# Altium PCB USB_Charger.PcbDoc
Units mm, origin at the board's own origin, x right, y up, seen from the top; angles counter-clockwise.
Board outline 29.21 x 14 mm, 2 copper layers (Top Layer, Bottom Layer); 18 components, 13 nets, 55 pads, 0 vias.
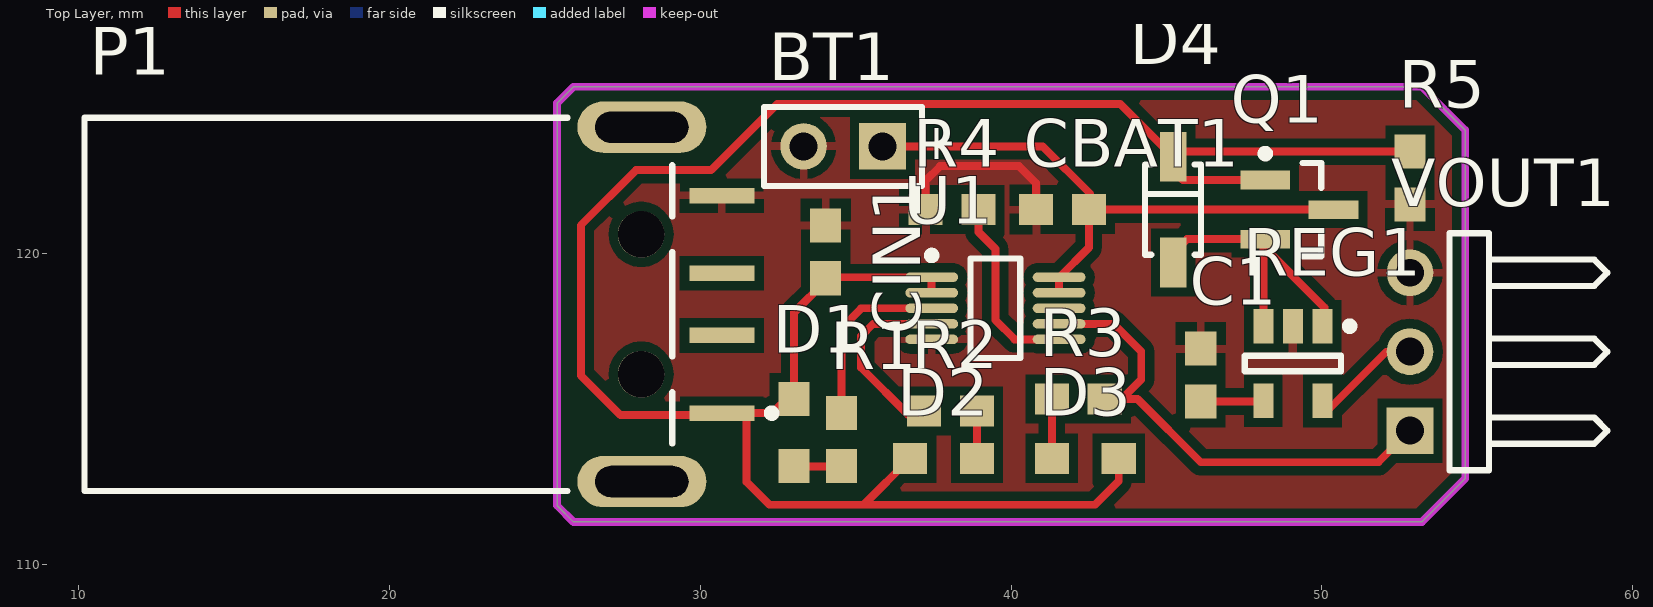
[diagram p0: Top Layer view]
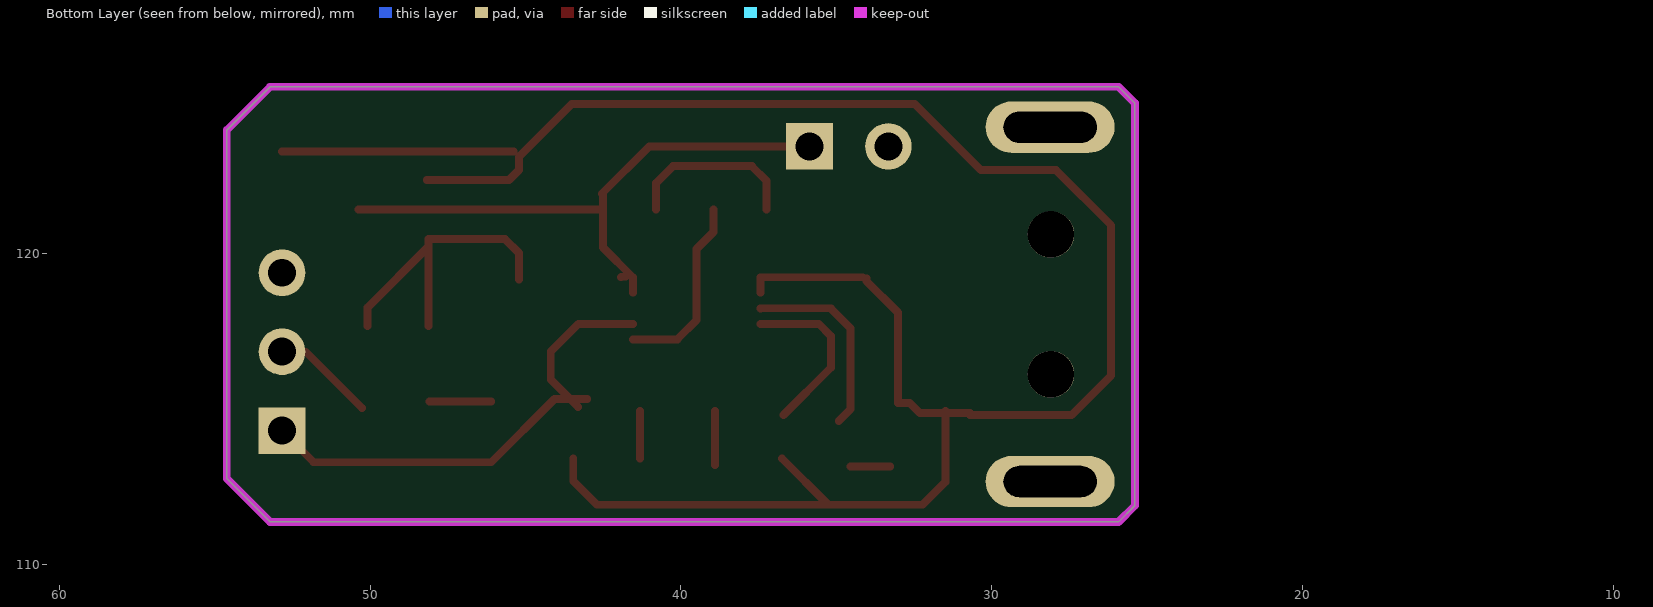
[diagram p1: Bottom Layer view, seen from below]

## Layer stack, top to bottom
Top Layer: signal copper 0.0356
Dielectric: dielectric 0.32, FR-4, Dk 4.8
Bottom Layer: signal copper 0.0356

## Board outline
25.923,111.364 25.4,111.887 25.4,124.841 25.923,125.364 53.213,125.364 54.61,123.967 54.61,112.761 53.213,111.364

## Design rules (kind name [scope] priority, off if disabled: settings)
Clearance [All] p1: gap=0.3
PolygonConnect [All] p1: connectstyle=Relief reliefconductorwidth=0.254 reliefentries=4 polygonreliefangle="90 Angle"
RoutingVias [All] p1: holewidth=0.711 width=1.27 viastyle="Through Hole" minholewidth=0.711 minwidth=1.27 maxholewidth=0.711 maxwidth=1.27
SilkscreenOverComponentPads [All] p1: minsilkscreentomaskgap=0.254
SolderMaskExpansion [All] p1: expansion=0.102
Width [All] p1: maxlimit=0.254 minlimit=0.254 preferedwidth=0.254
27 further rules are at their usual default settings.

## Components (designator, comment, footprint, x,y, rotation, side; value= is the part's Value field where it differs from the comment)
BT1 "Li-Ion" BAT-2 34.597,123.444 r180 top
C1 "Cap" 1608[0603] 46.101,116.089 r270 top
CBAT1 "Cap" 1608[0603] 41.656,121.412 r180 top
CIN1 "Cap" 1608[0603] 34.036,120.054 r270 top
D1 "Charge in Progress" 2013[0805] 33.02,115.316 r270 top
D2 "Charge Complete" 2013[0805] 36.754,113.411 r0 top
D3 "Power OK" 2013[0805] 43.464,113.411 r180 top
D4 "D Schottky" SOD123/X.85 45.212,121.412 r270 top
P1 "USB Type A" USBA_SMD 25.4,118.364 r180 top
Q1 "BSH202" SOT23_M 49.276,121.412 r0 top
R1 "Res2" 1608[0603] 34.544,114.016 r90 top
R2 "Res2" 1608[0603] 38.054,114.935 r180 top
R3 "Res2" 1608[0603] 42.164,115.316 r0 top
R4 "Res2" 1608[0603] 38.1,121.412 r0 top
R5 "Res2" 1608[0603] 52.832,122.428 r270 top
REG1 "LD6806TD/33H" DBV005_N 49.068,116.462 r270 top
U1 "MCP73833-AMI/UN" MSOP-UN10_N 39.497,118.237 r0 top
VOUT1 "Header 1" HDR1X3H 52.832,114.3 r90 top

## Footprints (in the part's own frame and the unit in brackets; to place one, negate y for a bottom-side part, rotate by r counter-clockwise, add the part's x,y. Pads: shape width x height; smd on the part's side, far side on the other; paste and mask are expansions set on the pad)
1608[0603] [mm] "Chip Capacitor; Body 1.6 x 0.8 mm (LxW typ)"
  rect 1.1x1 smd: 1(-0.85,0) 2(0.85,0)
  body extent -1,-0.5 0.9,0.5, height 1.3
2013[0805] [mm] "Chip Capacitor; Body 2.0 x 1.3 mm (LxW typ)"
  rect 1.1x1 smd: 1(0,0) 2(2.15,0)
  body extent 0,-0.5 2.15,0.5, height 1.3
BAT-2 [mm] "Multicell Battery; 2 Leads"
  rect 1.5x1.5 hole 0.9: 1(-1.27,0)
  round 1.5 hole 0.9: 2(1.27,0)
  silkscreen extent -2.54,-1.27 2.54,1.27
DBV005_N [mm] "SOT23, 5-Leads, Body 2.9x1.6mm, Pitch 0.95mm, Lead Span 2.8mm, IPC Medium Density"
  rect 1.1x0.65 smd: 1(-1.2,0.95) 2(-1.2,0) 3(-1.2,-0.95) 4(1.2,-0.95) 5(1.2,0.95)
  silkscreen extent -1.32,-1.55 0.25,1.95, body extent -0.9,-1.55 0.9,1.55, height 1.45
HDR1X3H [mm] "Connector; Header; 3 Position; Right Angle"
  rect 1.5x1.5 hole 0.9: 1(0,0)
  round 1.5 hole 0.9: 2(2.54,0) 3(5.08,0)
  silkscreen extent -1.27,-6.35 6.35,-1.27
MSOP-UN10_N [mm] "TSSOP, 10-Leads, Body 3x3mm, Pitch 0.5mm, IPC Medium Density"
  oval 1.7x0.3 smd: 1(-2.05,1) 2(-2.05,0.5) 3(-2.05,0) 4(-2.05,-0.5) 5(-2.05,-1) 6(2.05,-1) 7(2.05,-0.5) 8(2.05,0) 9(2.05,0.5) 10(2.05,1)
  silkscreen extent -2.17,-1.6 0.8,1.82, body extent -1.6,-1.6 1.6,1.6, height 1.1
SOD123/X.85 [mm] "SOD-123; 2 Leads; Body 2.7 x 1.6 mm, (LxW)"
  rect 1.6x0.85 smd: 1(-1.7,0) 2(1.7,0)
  silkscreen extent -1.45,-0.9 1.45,0.9
SOT23_M [mm] "SOT23, 3-Leads, Body 2.9x1.3mm, Pitch 0.95mm, Lead Span 2.3mm, IPC Low Density"
  rect 1.6x0.6 smd: 1(-1.1,0.95) 2(-1.1,-0.95) 3(1.1,0)
  silkscreen extent -1.22,-1.5 0.7,1.92, body extent -0.7,-1.5 0.7,1.5, height 1.1
USBA_SMD [mm]
  rect 2.1x0.5 smd: 1(-5.3,3.5) 2(-5.3,1) 3(-5.3,-1) 4(-5.3,-3.5)
  oval 4.15x1.65 hole 1 slot 3 at 0 deg: 5(-2.725,5.7) 5(-2.725,-5.7)
  round 1.5 hole 1.5: MH1(-2.7,-2.25) MH2(-2.7,2.25)
  silkscreen extent -7.02,-6 15.2,6, body extent -3.7,-6 15.2,6, height 4.5

## Part data
BT1: library part Battery, "Multicell Battery"
C1 CBAT1 CIN1: "Capacitor"
D1 D2 D3: library part "LED SMD (0603)"
D4: "Schottky Diode"
P1: library part "Header 4", "Header, 4-Pin"
Q1: "P-channel Enhancement Mode MOSFET"
R1 R2 R3 R4 R5: "Resistor"
REG1: library part TC1014-1.8VCT713, "50 mA, 100 mA and 150 mA CMOS LDOs with Active-Low Shutdown and Reference Bypass, 5-Pin SOT-23, Extended Temperature, Tape and Reel"
U1: "Stand-Alone Linear Li-Ion/Li-Polymer Charge Management Controller with Power-Good Output, 4.2V, 10-Pin MSOP, Industrial Temperature"
VOUT1: library part "Header 3", "Header, 3-Pin"

## Nets (pads, with @x,y where several pads share a name; then routed paths per layer and width w, separated by ;. In a path a pad name is that pad's centre, name@x,y a point inside that pad or via, vN(x,y) a via of type N, cw(c..) or ccw(c..) an arc to the next point about the centre after c; other vN are vias at no path point)
3.3V: REG1.5 VOUT1.2 | length 3.3
  Top Layer w0.254: REG1.5@50.255,115.025 52.07,116.84 VOUT1.2
5V: CIN1.2 D1.1 D2.1 D3.1 D4.1 P1.1 Q1.1 R5.1 U1.1 U1.2 | length 70.6
  Top Layer w0.254: P1.1@30.7,114.808 27.432,114.808 26.162,116.078 26.162,120.904 27.94,122.682 30.353,122.682 32.481,124.81 43.514,124.81 D4.1 45.212,122.682 45.532,122.362 Q1.1 ; P1.1 32.314,114.864 32.639,115.189 33.02,115.189 D1.1 33.02,118.102 34.036,119.118 CIN1.2 ; P1.1@31.496,114.935 31.496,112.649 32.227,111.918 42.703,111.918 43.464,112.679 D3.1 ; CIN1.2@34.155,119.237 U1.1 U1.2 ; 35.268,111.925 D2.1 ; D4.1@45.378,123.278 R5.1
CHG_SEN: R3.2 U1.7 VOUT1.1 | length 16.2
  Top Layer w0.254: U1.7 43.299,117.737 44.189,116.847 44.189,115.944 R3.2@43.307,115.062 ; R3.2 44.069,115.316 46.101,113.284 51.816,113.284 VOUT1.1
GND: BT1.2 C1.1 CBAT1.2 CIN1.1 P1.4 R4.1 R5.2 REG1.2 U1.5 VOUT1.3 | length 5.8
  Top Layer w0.254: R4.1 37.25,122.34 37.719,122.809 40.259,122.809 40.806,122.262 CBAT1.2
NetBT1_1: BT1.1 CBAT1.1 Q1.3 U1.9 U1.10 | length 18.5
  Top Layer w0.254: BT1.1@36.322,123.444 41.021,123.444 42.545,121.92 42.506,121.881 CBAT1.1 ; U1.9 U1.10 42.506,120.196 CBAT1.1 ; U1.10@41.783,119.253 41.91,119.253 U1.10@41.926,119.237 ; Q1.3 CBAT1.1
NetC1_2: C1.2 REG1.4 | length 2
  Top Layer w0.254: C1.2 REG1.4@48.095,115.239
NetD1_2: D1.2 R1.1 | length 1.3
  Top Layer w0.254: D1.2@33.266,113.152 R1.1@34.544,113.152
NetD2_2: D2.2 R2.1 | length 1.7
  Top Layer w0.254: D2.2@38.904,113.197 R2.1
NetD3_2: D3.2 R3.1 | length 1.5
  Top Layer w0.254: D3.2 R3.1@41.314,114.935
NetD4_2: D4.2 Q1.2 REG1.1 REG1.3 | length 10.1
  Top Layer w0.254: D4.2@45.212,119.162 45.212,120.015 45.659,120.462 48.118,120.462 Q1.2@48.118,120.222 ; REG1.3 Q1.2@48.118,120.222 ; REG1.1@50.084,117.662 50.084,118.256 Q1.2@48.118,120.222
NetR4_2: R4.2 U1.6 | length 6.1
  Top Layer w0.254: R4.2 38.95,120.689 39.497,120.142 39.497,117.856 40.116,117.237 U1.6
STAT1: R1.2 U1.3 | length 6.3
  Top Layer w0.254: R1.2@34.925,114.612 34.544,114.993 34.544,117.594 35.179,118.229 ; 35.179,118.237 U1.3 U1.3@37.439,118.229
STAT2: R2.2 U1.4 | length 5.6
  Top Layer w0.254: R2.2@36.699,114.804 35.179,116.325 35.179,117.348 35.568,117.737 U1.4
pads on no net: P1.2 P1.3 P1.5 P1.MH1 P1.MH2 U1.8

## Polygon pours and split planes (outlines as drawn)
GND on Top Layer "Bottom Layer-GND" (solid, remove dead copper, pour order 1000): 25.374,125.453 53.187,125.453 54.584,124.056 54.584,112.85 53.187,111.453 25.374,111.453 25.374,125.453

## Keep-outs
Keep-Out Layer:
  the board outline again, w0.254

## Text inside footprints (layer, text, board x,y; h text height)
BT1: Top Overlay "+" at 38.267,124.021 h1.15 r180
P1: Mechanical 1 "PCB Edge" at 24.927,123.537 h0.25 r270